# EAGLE board EagleIO (EAGLE 7.2.0)
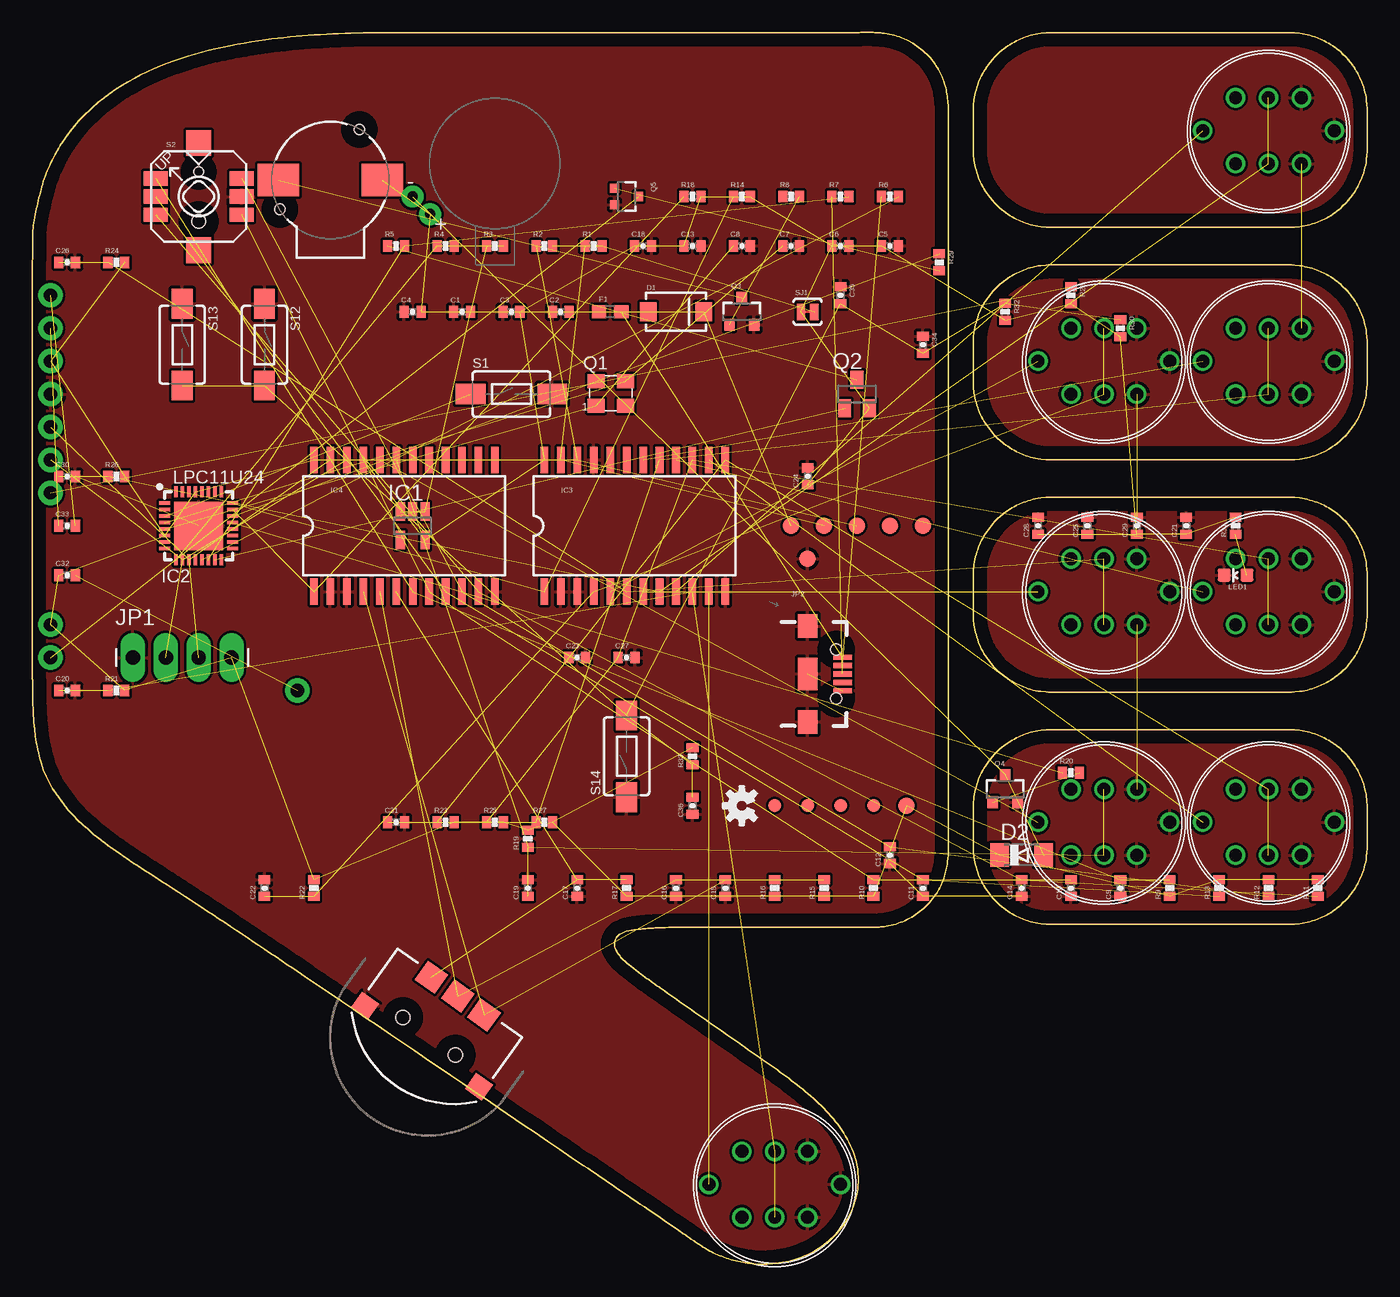
[diagram p0: board, top side]
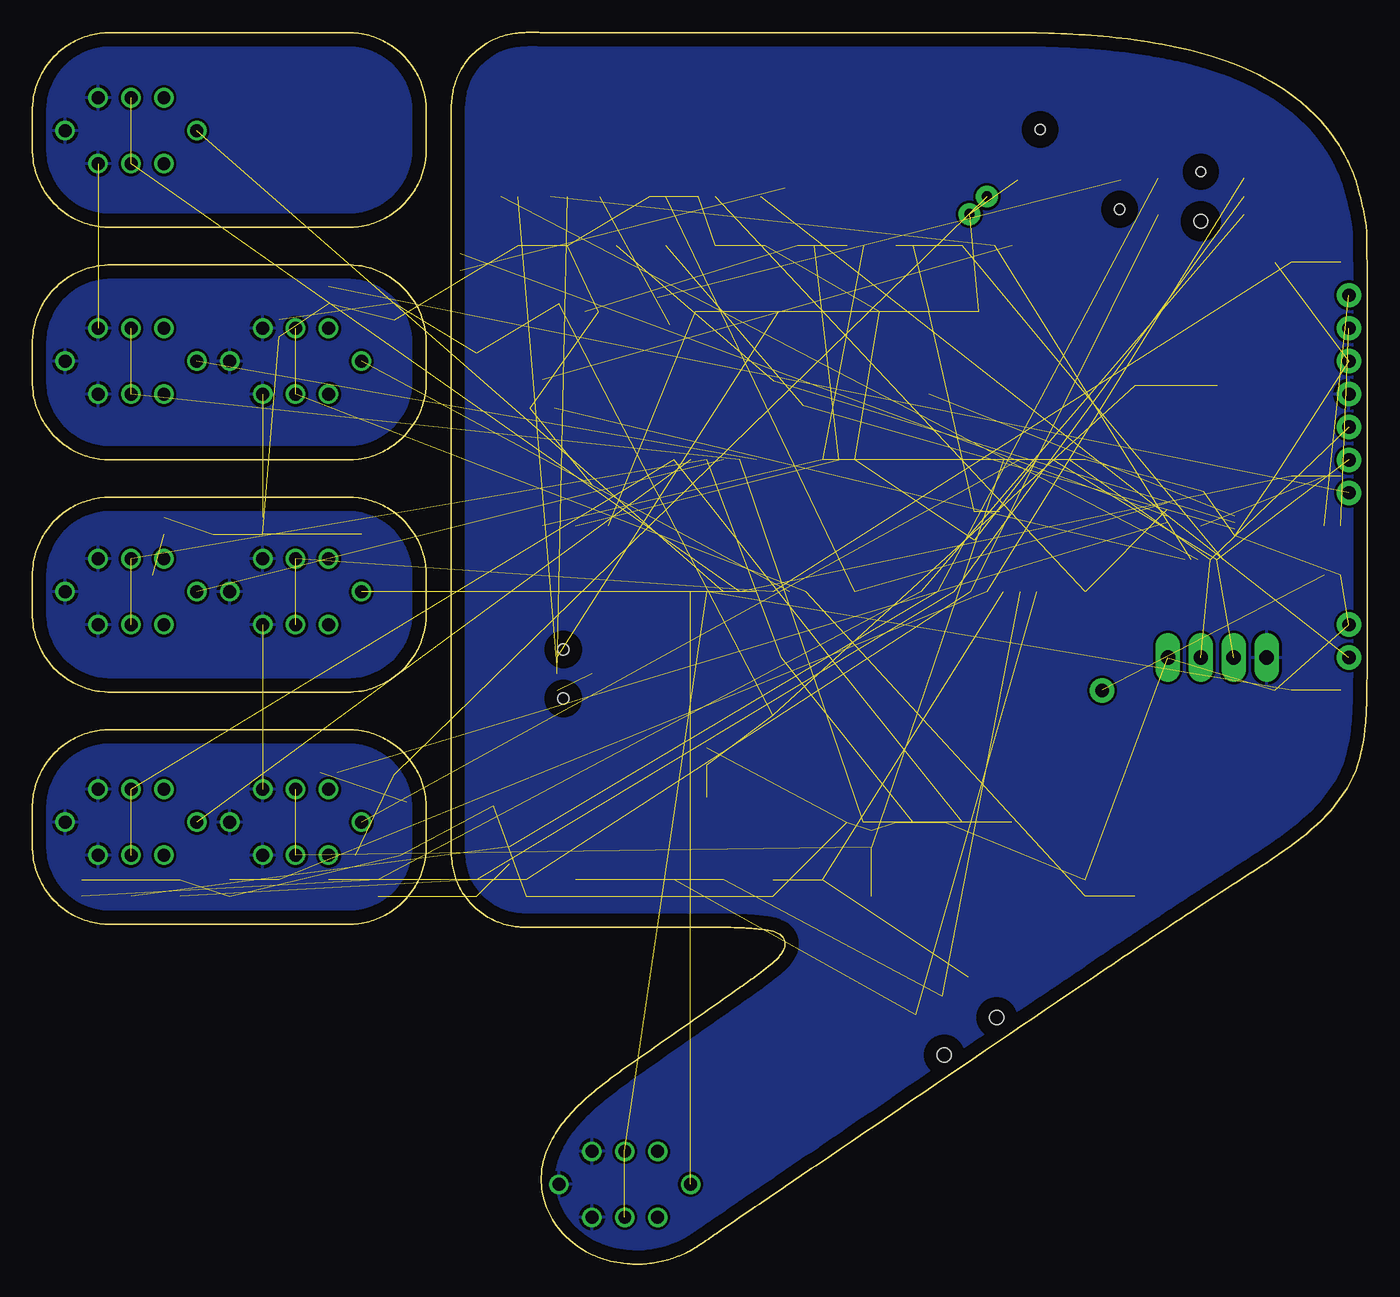
[diagram p1: board, bottom side, seen from below]

Size 102.99 x 95.01 mm. Coordinates in mm from the lower left corner, seen from the top.
Outline: 56.86,0.01 57.12,0.03 57.37,0.05 57.63,0.09 57.88,0.13 58.13,0.18 58.38,0.24 58.63,0.3 58.87,0.37 59.35,0.54 59.59,0.64 59.82,0.75 60.05,0.85 60.27,0.97 60.49,1.1 60.71,1.23 60.92,1.37 61.33,1.68 61.52,1.84 61.9,2.19 62.07,2.38 62.24,2.58 62.41,2.78 62.57,2.99 62.71,3.21 62.85,3.43 62.98,3.65 63.1,3.89 63.21,4.12 63.31,4.35 63.4,4.6 63.48,4.84 63.55,5.08 63.66,5.58 63.7,5.83 63.72,6.09 63.74,6.34 63.75,6.6 63.72,7.11 63.69,7.37 63.64,7.63 63.59,7.88 63.52,8.14 63.44,8.39 63.35,8.65 63.25,8.9 63.13,9.15 63.02,9.4 62.89,9.64 62.75,9.87 62.61,10.11 62.46,10.33 62.3,10.56 62.15,10.78 61.98,11 61.8,11.21 61.63,11.42 61.44,11.62 61.25,11.83 61.06,12.03 60.87,12.22 60.67,12.41 60.47,12.6 60.27,12.78 60.06,12.96 59.86,13.14 59.65,13.31 59.44,13.48 59.23,13.66 59.01,13.83 58.58,14.16 58.36,14.33 58.14,14.49 57.92,14.66 57.7,14.82 57.48,14.98 57.25,15.14 57.03,15.3 56.81,15.46 56.58,15.62 56.35,15.77 56.13,15.93 55.9,16.09 55.68,16.25 55.45,16.4 55.23,16.56 55,16.71 54.77,16.87 54.55,17.03 54.32,17.18 54.1,17.34 53.87,17.5 53.63,17.66 53.17,17.99 52.94,18.15 52.71,18.31 52.48,18.47 52.24,18.64 52.01,18.8 51.78,18.96 51.55,19.12 51.32,19.28 51.08,19.45 50.85,19.61 50.62,19.77 50.39,19.93 50.16,20.1 49.93,20.26 49.7,20.42 49.46,20.59 49.23,20.75 49,20.91 48.77,21.08 48.54,21.24 48.44,21.31 48.34,21.38 48.24,21.46 48.14,21.53 48.03,21.6 47.93,21.67 47.83,21.74 47.73,21.82 47.63,21.89 47.53,21.96 47.42,22.03 47.32,22.1 47.22,22.18 47.12,22.25 46.92,22.4 46.82,22.47 46.72,22.55 46.62,22.62 46.52,22.7 46.43,22.78 46.33,22.86 46.23,22.93 46.14,23.01 46.07,23.07 46,23.12 45.93,23.19 45.86,23.25 45.78,23.32 45.7,23.39 45.63,23.46 45.55,23.53 45.4,23.69 45.33,23.77 45.2,23.94 45.14,24.03 45.04,24.21 44.99,24.3 44.96,24.39 44.93,24.49 44.91,24.58 44.91,24.68 44.91,24.77 44.92,24.87 44.95,24.96 44.98,25.06 45.03,25.15 45.09,25.23 45.15,25.31 45.23,25.38 45.32,25.43 45.41,25.49 45.5,25.54 45.71,25.63 45.83,25.66 46.06,25.72 46.17,25.75 46.29,25.77 46.41,25.79 46.53,25.8 46.76,25.83 46.87,25.84 46.97,25.85 47.07,25.86 47.17,25.86 47.25,25.87 47.37,25.88 47.48,25.89 47.71,25.91 47.83,25.92 47.94,25.93 48.06,25.93 48.18,25.94 48.29,25.95 48.41,25.95 48.52,25.96 48.64,25.96 48.76,25.96 48.87,25.97 49.1,25.97 49.22,25.98 49.34,25.98 49.45,25.98 49.57,25.98 49.68,25.98 49.8,25.98 49.92,25.98 50.03,25.98 50.28,25.98 50.53,25.99 51.04,25.99 51.29,25.99 51.54,25.99 51.79,25.99 52.04,25.99 52.29,25.99 52.55,25.99 52.8,25.99 53.05,25.99 53.3,25.99 53.55,25.99 53.8,25.99 54.06,25.99 54.31,25.99 54.56,25.99 54.81,25.99 55.06,25.99 55.31,25.99 55.56,25.99 55.82,25.99 56.07,25.99 56.37,25.99 56.68,25.99 57.28,25.99 57.59,25.99 57.89,25.99 58.2,25.99 58.5,25.99 58.81,25.99 59.11,25.99 59.41,25.99 59.72,25.99 60.02,25.99 60.33,25.99 60.94,25.99 61.24,25.99 61.54,25.99 61.85,25.99 62.15,25.99 62.46,25.99 62.76,25.99 63.07,25.99 63.47,25.99 63.57,25.99 63.68,25.99 63.78,25.99 63.89,25.99 63.99,25.99 64.09,25.99 64.2,25.98 64.3,25.98 64.41,25.98 64.51,25.98 64.72,25.98 64.83,25.98 65.03,25.99 65.14,25.99 65.24,26 65.35,26 65.45,26.01 65.65,26.03 65.76,26.05 65.86,26.06 66.05,26.09 66.24,26.13 66.43,26.18 66.62,26.23 66.8,26.29 66.98,26.36 67.17,26.43 67.34,26.51 67.52,26.59 67.69,26.68 67.86,26.78 68.02,26.88 68.18,26.98 68.34,27.1 68.5,27.22 68.65,27.34 68.79,27.46 68.93,27.6 69.07,27.73 69.21,27.87 69.33,28.02 69.46,28.17 69.58,28.32 69.69,28.48 69.78,28.62 69.87,28.76 69.95,28.91 70.03,29.05 70.1,29.19 70.23,29.49 70.29,29.64 70.34,29.79 70.39,29.94 70.43,30.09 70.47,30.24 70.51,30.4 70.54,30.55 70.57,30.71 70.6,30.86 70.62,31.02 70.65,31.34 70.66,31.5 70.67,31.66 70.68,31.82 70.68,31.99 70.68,89.06 70.68,89.23 70.67,89.41 70.66,89.58 70.65,89.75 70.62,89.92 70.6,90.08 70.58,90.25 70.54,90.42 70.51,90.58 70.47,90.75 70.38,91.07 70.33,91.23 70.27,91.39 70.21,91.54 70.14,91.7 70.07,91.85 69.99,92.01 69.91,92.16 69.82,92.3 69.73,92.45 69.63,92.6 69.52,92.74 69.4,92.89 69.28,93.04 69.01,93.33 68.87,93.46 68.72,93.59 68.58,93.72 68.42,93.84 68.11,94.06 67.94,94.17 67.6,94.36 67.43,94.44 67.25,94.52 67.07,94.6 66.89,94.67 66.71,94.73 66.52,94.79 66.33,94.84 66.14,94.88 65.95,94.92 65.76,94.95 65.56,94.97 65.47,94.98 65.37,94.99 65.27,94.99 65.18,95 65.08,95 64.98,95.01 64.88,95.01 64.79,95.01 64.69,95.01 64.59,95.01 64.5,95.01 64.4,95.01 64.3,95.01 64.2,95.01 64.1,95.01 64.01,95.01 63.91,95.01 63.81,95.01 63.72,95.01 63.62,95 63.42,95 63.33,95 28.85,95 28.37,95 27.9,95 27.43,95 26.95,94.99 26.48,94.99 26.01,94.98 25.54,94.97 24.59,94.95 24.12,94.93 23.65,94.92 23.17,94.9 22.7,94.87 22.23,94.85 21.76,94.82 21.29,94.79 20.82,94.75 20.34,94.71 19.87,94.67 19.4,94.62 18.93,94.57 18.46,94.51 17.99,94.45 17.45,94.37 16.9,94.29 16.35,94.2 15.8,94.1 15.26,94 14.71,93.88 14.16,93.76 13.62,93.63 13.08,93.49 12.53,93.34 12,93.18 10.94,92.83 10.41,92.64 9.89,92.42 9.38,92.21 8.87,91.98 8.37,91.73 7.88,91.48 7.39,91.21 6.92,90.92 6.45,90.63 5.99,90.31 5.54,89.97 5.33,89.81 5.12,89.65 4.92,89.48 4.72,89.31 4.52,89.13 4.33,88.95 4.14,88.77 3.95,88.58 3.59,88.19 3.42,88 3.08,87.59 2.91,87.39 2.6,86.96 2.45,86.75 2.16,86.3 2.02,86.08 1.76,85.62 1.63,85.39 1.52,85.15 1.42,84.95 1.33,84.75 1.15,84.34 1.07,84.14 1,83.93 0.92,83.72 0.86,83.52 0.79,83.31 0.73,83.1 0.67,82.89 0.55,82.47 0.5,82.26 0.45,82.05 0.4,81.83 0.36,81.62 0.31,81.41 0.27,81.19 0.23,80.97 0.19,80.76 0.15,80.54 0.12,80.32 0.08,80.1 0.07,80.01 0.06,79.92 0.04,79.73 0.03,79.64 0.02,79.45 0.02,79.36 0.01,79.26 0.01,79.16 0.01,79.07 0.01,78.97 0.01,78.87 0.01,78.78 0.01,78.68 0.01,78.59 0.01,78.49 0.02,78.3 0.02,78.2 0.02,78.11 0.02,78.02 0.02,77.92 0.01,77.83 0.01,77.73 0.01,77.63 0.01,77.53 0.01,77.44 0.01,77.34 0,77.24 0,77.14 0,77.04 0,76.94 0,76.84 0,76.75 0,76.65 0,76.55 0,76.45 0,76.35 0,76.25 0,76.15 0,76.06 0,75.96 0,75.86 0,75.76 0,75.66 0,75.56 0,49.36 0,49.17 0,48.98 0,48.79 0,48.6 0,48.41 0,48.22 0,48.04 0,47.66 0,47.47 0,47.28 0,47.09 0,46.9 0,46.71 0,46.52 0,46.33 0,46.14 0,45.95 0,45.76 0,45.57 0,45.38 0.01,45.19 0.01,45 0.01,44.74 0.01,44.47 0.02,44.21 0.02,43.94 0.02,43.68 0.03,43.41 0.04,43.14 0.05,42.87 0.07,42.34 0.09,42.07 0.11,41.8 0.14,41.54 0.16,41.27 0.23,40.74 0.27,40.48 0.31,40.21 0.36,39.95 0.41,39.69 0.48,39.43 0.54,39.17 0.61,38.92 0.69,38.66 0.85,38.15 1.06,37.66 1.3,37.19 1.54,36.72 1.82,36.28 2.13,35.85 2.44,35.43 2.78,35.02 3.14,34.64 3.51,34.25 3.89,33.88 4.3,33.53 4.7,33.18 5.12,32.84 5.98,32.18 6.42,31.87 7.31,31.26 7.75,30.97 8.2,30.68 8.64,30.39 9.08,30.11 9.51,29.84 9.96,29.55 10.4,29.26 10.85,28.97 11.29,28.69 11.73,28.4 12.18,28.11 12.62,27.82 13.06,27.53 13.51,27.23 13.95,26.94 14.39,26.65 14.83,26.36 15.27,26.06 15.71,25.77 16.15,25.48 16.59,25.18 17.03,24.89 17.47,24.59 17.91,24.3 18.35,24 18.79,23.7 19.23,23.41 19.67,23.11 20.11,22.82 21.05,22.18 21.98,21.55 22.92,20.92 23.85,20.29 24.79,19.65 25.72,19.02 26.66,18.38 27.59,17.75 28.53,17.12 29.46,16.48 30.4,15.85 32.27,14.58 33.2,13.94 34.14,13.31 35.07,12.67 36.01,12.04 37.87,10.77 38.81,10.13 39.74,9.5 40.68,8.86 41.61,8.23 42.55,7.59 42.86,7.38 43.17,7.17 43.48,6.96 43.79,6.74 44.1,6.53 44.41,6.32 44.73,6.11 45.04,5.9 45.66,5.47 45.97,5.26 46.28,5.05 46.59,4.84 46.9,4.62 47.22,4.41 47.53,4.2 47.84,3.99 48.46,3.57 48.77,3.35 49.4,2.93 49.71,2.72 50.02,2.51 50.12,2.44 50.22,2.37 50.32,2.29 50.42,2.22 50.53,2.15 50.63,2.08 50.73,2.01 50.83,1.94 51.04,1.8 51.14,1.73 51.34,1.59 51.45,1.52 51.55,1.45 51.66,1.38 51.76,1.32 51.87,1.25 51.97,1.19 52.08,1.13 52.3,1.01 52.41,0.95 52.52,0.9 52.69,0.81 52.86,0.74 53.03,0.66 53.2,0.59 53.38,0.53 53.55,0.47 53.73,0.41 53.91,0.35 54.09,0.3 54.27,0.26 54.45,0.21 54.63,0.18 54.82,0.14 55,0.11 55.19,0.08 55.37,0.06 55.56,0.04 55.93,0.01 56.12,0 56.49,0 56.68,0 56.86,0.01
Outline: 78.41,44.13 78.2,44.14 77.8,44.18 77.6,44.21 77.41,44.25 77.21,44.29 77.02,44.34 76.84,44.4 76.65,44.46 76.46,44.52 76.11,44.68 75.93,44.76 75.76,44.85 75.59,44.95 75.43,45.05 75.27,45.15 75.11,45.26 74.95,45.38 74.8,45.5 74.66,45.62 74.51,45.75 74.24,46.02 74.11,46.17 73.87,46.46 73.75,46.62 73.64,46.78 73.53,46.94 73.43,47.1 73.34,47.27 73.25,47.44 73.16,47.62 73.01,47.98 72.94,48.16 72.89,48.35 72.83,48.53 72.78,48.73 72.74,48.92 72.7,49.12 72.67,49.31 72.62,49.72 72.61,49.92 72.61,53.36 72.62,53.57 72.67,53.97 72.7,54.17 72.74,54.36 72.78,54.56 72.83,54.75 72.89,54.94 72.94,55.12 73.01,55.31 73.16,55.67 73.25,55.84 73.34,56.01 73.43,56.18 73.53,56.35 73.75,56.67 73.87,56.82 74.11,57.12 74.24,57.26 74.51,57.53 74.66,57.66 74.95,57.91 75.11,58.02 75.43,58.24 75.59,58.34 75.76,58.43 75.93,58.52 76.11,58.61 76.46,58.76 76.65,58.83 76.84,58.89 77.02,58.95 77.21,59 77.6,59.08 77.8,59.11 78.2,59.15 78.41,59.16 97.2,59.16 97.4,59.15 97.8,59.11 98,59.08 98.2,59.04 98.39,59 98.58,58.95 98.77,58.89 98.96,58.83 99.14,58.76 99.5,58.61 99.68,58.52 99.85,58.43 100.02,58.34 100.18,58.24 100.5,58.02 100.65,57.91 100.95,57.66 101.09,57.53 101.37,57.26 101.49,57.12 101.74,56.82 101.86,56.67 102.07,56.35 102.17,56.18 102.27,56.01 102.36,55.84 102.44,55.67 102.59,55.31 102.66,55.12 102.72,54.94 102.78,54.75 102.83,54.56 102.91,54.17 102.94,53.97 102.98,53.57 102.99,53.36 102.99,49.92 102.98,49.72 102.94,49.31 102.91,49.12 102.87,48.92 102.83,48.73 102.78,48.53 102.72,48.35 102.66,48.16 102.59,47.98 102.44,47.62 102.36,47.44 102.27,47.27 102.17,47.1 102.07,46.94 101.96,46.78 101.86,46.62 101.74,46.46 101.49,46.17 101.37,46.02 101.09,45.75 100.95,45.62 100.8,45.5 100.65,45.38 100.5,45.26 100.34,45.15 100.18,45.05 100.02,44.95 99.85,44.85 99.68,44.76 99.5,44.68 99.14,44.52 98.96,44.46 98.77,44.4 98.58,44.34 98.39,44.29 98.2,44.25 98,44.21 97.8,44.18 97.4,44.14 97.2,44.13 78.41,44.13
Outline: 78.41,26.2 78.2,26.21 77.8,26.26 77.6,26.29 77.41,26.33 77.21,26.37 77.02,26.42 76.84,26.48 76.65,26.53 76.46,26.6 76.11,26.75 75.93,26.84 75.76,26.93 75.59,27.02 75.43,27.12 75.27,27.23 75.11,27.34 74.95,27.46 74.66,27.7 74.51,27.83 74.24,28.1 74.11,28.25 73.99,28.39 73.87,28.54 73.75,28.7 73.64,28.86 73.53,29.02 73.43,29.18 73.34,29.35 73.25,29.52 73.16,29.7 73.01,30.05 72.94,30.24 72.89,30.43 72.83,30.61 72.78,30.8 72.74,31 72.7,31.19 72.67,31.39 72.62,31.79 72.61,32 72.61,35.44 72.62,35.65 72.65,35.85 72.67,36.05 72.7,36.25 72.74,36.44 72.78,36.64 72.83,36.83 72.89,37.02 72.94,37.2 73.01,37.39 73.16,37.75 73.25,37.92 73.34,38.09 73.43,38.26 73.53,38.43 73.75,38.74 73.87,38.9 74.11,39.2 74.24,39.34 74.38,39.47 74.51,39.61 74.66,39.74 74.95,39.98 75.11,40.1 75.43,40.32 75.59,40.42 75.76,40.51 75.93,40.6 76.11,40.69 76.46,40.84 76.65,40.91 76.84,40.97 77.02,41.02 77.21,41.07 77.6,41.15 77.8,41.18 78.2,41.23 78.41,41.24 97.2,41.24 97.4,41.23 97.8,41.18 98,41.15 98.2,41.11 98.39,41.07 98.58,41.02 98.77,40.97 98.96,40.91 99.14,40.84 99.5,40.69 99.68,40.6 99.85,40.51 100.02,40.42 100.18,40.32 100.5,40.1 100.65,39.98 100.95,39.74 101.09,39.61 101.23,39.47 101.37,39.34 101.49,39.2 101.74,38.9 101.86,38.74 102.07,38.43 102.17,38.26 102.27,38.09 102.36,37.92 102.44,37.75 102.59,37.39 102.66,37.2 102.72,37.02 102.78,36.83 102.83,36.64 102.91,36.25 102.94,36.05 102.96,35.85 102.98,35.65 102.99,35.44 102.99,32 102.98,31.79 102.94,31.39 102.91,31.19 102.87,31 102.83,30.8 102.78,30.61 102.72,30.43 102.66,30.24 102.59,30.05 102.44,29.7 102.36,29.52 102.27,29.35 102.17,29.18 102.07,29.02 101.96,28.86 101.86,28.7 101.74,28.54 101.62,28.39 101.49,28.25 101.37,28.1 101.09,27.83 100.95,27.7 100.65,27.46 100.5,27.34 100.34,27.23 100.18,27.12 100.02,27.02 99.85,26.93 99.68,26.84 99.5,26.75 99.14,26.6 98.96,26.53 98.77,26.48 98.58,26.42 98.39,26.37 98.2,26.33 98,26.29 97.8,26.26 97.4,26.21 97.2,26.2 78.41,26.2
Outline: 78.41,62.05 78.2,62.06 77.8,62.1 77.6,62.13 77.21,62.21 77.02,62.26 76.84,62.32 76.65,62.38 76.46,62.44 76.11,62.6 75.93,62.68 75.76,62.77 75.59,62.87 75.43,62.97 75.27,63.08 75.11,63.18 74.95,63.3 74.66,63.54 74.51,63.67 74.24,63.95 74.11,64.09 73.87,64.38 73.75,64.54 73.64,64.7 73.53,64.86 73.43,65.02 73.34,65.19 73.25,65.36 73.16,65.54 73.01,65.9 72.94,66.08 72.89,66.27 72.83,66.46 72.78,66.65 72.74,66.84 72.7,67.04 72.67,67.24 72.62,67.64 72.61,67.84 72.61,71.29 72.62,71.49 72.67,71.89 72.7,72.09 72.74,72.28 72.78,72.48 72.83,72.67 72.89,72.86 72.94,73.05 73.01,73.23 73.16,73.59 73.25,73.76 73.34,73.93 73.43,74.1 73.53,74.27 73.75,74.59 73.87,74.74 74.11,75.04 74.24,75.18 74.51,75.45 74.66,75.58 74.95,75.83 75.11,75.94 75.27,76.05 75.43,76.16 75.59,76.26 75.76,76.35 75.93,76.45 76.11,76.53 76.46,76.68 76.65,76.75 76.84,76.81 77.02,76.87 77.21,76.92 77.6,77 77.8,77.03 78.2,77.07 78.41,77.08 97.2,77.08 97.4,77.07 97.8,77.03 98,77 98.2,76.96 98.39,76.92 98.58,76.87 98.77,76.81 98.96,76.75 99.14,76.68 99.5,76.53 99.68,76.45 99.85,76.35 100.02,76.26 100.18,76.16 100.34,76.05 100.5,75.94 100.65,75.83 100.95,75.58 101.09,75.45 101.37,75.18 101.49,75.04 101.74,74.74 101.86,74.59 102.07,74.27 102.17,74.1 102.27,73.93 102.36,73.76 102.44,73.59 102.59,73.23 102.66,73.05 102.72,72.86 102.78,72.67 102.83,72.48 102.91,72.09 102.94,71.89 102.98,71.49 102.99,71.29 102.99,67.84 102.98,67.64 102.94,67.24 102.91,67.04 102.87,66.84 102.83,66.65 102.78,66.46 102.72,66.27 102.66,66.08 102.59,65.9 102.44,65.54 102.36,65.36 102.27,65.19 102.17,65.02 102.07,64.86 101.96,64.7 101.86,64.54 101.74,64.38 101.49,64.09 101.37,63.95 101.09,63.67 100.95,63.54 100.65,63.3 100.5,63.18 100.34,63.08 100.18,62.97 100.02,62.87 99.68,62.68 99.5,62.6 99.14,62.44 98.96,62.38 98.77,62.32 98.58,62.26 98.39,62.21 98.2,62.17 98,62.13 97.8,62.1 97.4,62.06 97.2,62.05 78.41,62.05
Outline: 78.41,79.97 78.2,79.98 77.8,80.02 77.6,80.05 77.21,80.13 77.02,80.18 76.84,80.24 76.65,80.3 76.46,80.37 76.11,80.52 75.93,80.6 75.76,80.7 75.59,80.79 75.43,80.89 75.11,81.11 74.95,81.22 74.66,81.47 74.51,81.6 74.24,81.87 74.11,82.01 73.87,82.31 73.75,82.46 73.53,82.78 73.43,82.95 73.34,83.12 73.25,83.29 73.16,83.46 73.01,83.82 72.94,84 72.89,84.19 72.83,84.38 72.78,84.57 72.74,84.76 72.7,84.96 72.67,85.16 72.62,85.56 72.61,85.76 72.61,89.21 72.62,89.41 72.67,89.81 72.7,90.01 72.74,90.21 72.78,90.4 72.83,90.59 72.89,90.78 72.94,90.97 73.01,91.15 73.16,91.51 73.25,91.68 73.34,91.85 73.43,92.02 73.53,92.19 73.64,92.35 73.75,92.51 73.87,92.66 74.11,92.96 74.24,93.1 74.51,93.37 74.66,93.5 74.95,93.75 75.11,93.86 75.27,93.97 75.43,94.08 75.59,94.18 75.76,94.27 75.93,94.37 76.11,94.45 76.46,94.6 76.65,94.67 76.84,94.73 77.02,94.79 77.21,94.84 77.41,94.88 77.6,94.92 77.8,94.95 78.2,94.99 78.41,95 97.2,95 97.4,94.99 97.8,94.95 98,94.92 98.2,94.88 98.39,94.84 98.58,94.79 98.77,94.73 98.96,94.67 99.14,94.6 99.5,94.45 99.68,94.37 99.85,94.27 100.02,94.18 100.18,94.08 100.34,93.97 100.5,93.86 100.65,93.75 100.95,93.5 101.09,93.37 101.37,93.1 101.49,92.96 101.74,92.66 101.86,92.51 101.96,92.35 102.07,92.19 102.17,92.02 102.27,91.85 102.36,91.68 102.44,91.51 102.59,91.15 102.66,90.97 102.72,90.78 102.78,90.59 102.83,90.4 102.87,90.21 102.91,90.01 102.94,89.81 102.98,89.41 102.99,89.21 102.99,85.76 102.98,85.56 102.94,85.16 102.91,84.96 102.87,84.76 102.83,84.57 102.78,84.38 102.72,84.19 102.66,84 102.59,83.82 102.44,83.46 102.36,83.29 102.27,83.12 102.17,82.95 102.07,82.78 101.86,82.46 101.74,82.31 101.49,82.01 101.37,81.87 101.09,81.6 100.95,81.47 100.65,81.22 100.5,81.11 100.18,80.89 100.02,80.79 99.85,80.7 99.68,80.6 99.5,80.52 99.14,80.37 98.96,80.3 98.77,80.24 98.58,80.18 98.39,80.13 98.2,80.09 98,80.05 97.8,80.02 97.4,79.98 97.2,79.97 78.41,79.97
Copper layers (1*16): Top 0.035mm / dielectric 1.5mm / Bottom 0.035mm
Design rules "default": minimum track width 10mil, minimum drill 24mil, track to track 8mil, track to pad 8mil, pad to pad 8mil, via to via 8mil, smd to smd 8mil, copper to edge 40mil, drill to drill 8mil, minimum pad ring 10mil, minimum via ring 8mil, stop-mask expansion 4mil, vias tented up to drill 0mil, thermal gap 10mil
Net classes: 0 default: width 0.254 mm, drill 0.254 mm, clearance 0.203 mm; 1 power: width 0.61 mm, drill 0.61 mm, clearance 0.254 mm

## Footprints (pad centres in the part's own frame; a part is rotated, then mirrored left to right if it is on the bottom)
0402-CAP = smd 0.7 x 0.9: 1 -0.65,0; 2 0.65,0
SMA-DIODE = smd 1.27 x 1.47: A -2.15,0; C 2.15,0
MINIMELF = smd 1.4 x 1.8: A 1.7,0; C -1.7,0
0603 = smd 1.1 x 1: 1 -0.85,0; 2 0.85,0
FIDUCIAL-1X2 = smd 1 x 1: 1 0,0
SOT23-5 = smd 0.7 x 1.4: 1 0.95,1.1; 2 0,1.1; 3 -0.95,1.1; 4 -0.95,-1.1; 5 0.95,-1.1
HVQFN33_5X5MM = smd 0.85 x 0.27: 1 -2.625,1.75; 2 -2.625,1.25; 3 -2.625,0.75; 4 -2.625,0.25; 5 -2.625,-0.25; 6 -2.625,-0.75; 7 -2.625,-1.25; 8 -2.625,-1.75; 17 2.625,-1.75; 18 2.625,-1.25; 19 2.625,-0.75; 20 2.625,-0.25; 21 2.625,0.25; 22 2.625,0.75; 23 2.625,1.25; 24 2.625,1.75 | smd 0.27 x 0.85: 9 -1.75,-2.625; 10 -1.25,-2.625; 11 -0.75,-2.625; 12 -0.25,-2.625; 13 0.25,-2.625; 14 0.75,-2.625; 15 1.25,-2.625; 16 1.75,-2.625; 25 1.75,2.625; 26 1.25,2.625; 27 0.75,2.625; 28 0.25,2.625; 29 -0.25,2.625; 30 -0.75,2.625; 31 -1.25,2.625; 32 -1.75,2.625 | smd 3.75 x 3.75: 33 0,0
SO-24DW = smd 0.584 x 2.032: 1 -6.35,-5.08; 2 -5.08,-5.08; 3 -3.81,-5.08; 4 -2.54,-5.08; 5 -1.27,-5.08; 6 0,-5.08; 7 1.27,-5.08; 8 2.54,-5.08; 9 3.81,-5.08; 10 5.08,-5.08; 11 6.35,-5.08; 12 7.62,-5.08; 13 7.62,5.08; 14 6.35,5.08; 15 5.08,5.08; 16 3.81,5.08; 17 2.54,5.08; 18 1.27,5.08; 19 0,5.08; 20 -1.27,5.08; 21 -2.54,5.08; 22 -3.81,5.08; 23 -5.08,5.08; 24 -6.35,5.08
1X04_LONGPADS = drill 1.118 pad 1.88 long: 1 0,0; 2 2.54,0; 3 5.08,0; 4 7.62,0
USB-B-MICRO-SMD_V03 = smd 1.4 x 0.4: D+1 2.7,0; D-1 2.7,0.65; GND1 2.7,-1.3; ID1 2.7,-0.65; VBUS1 2.7,1.3 | smd 1.5 x 1.8: SHIELD1 0,3.7; SHIELD2 0,-3.7 | smd 1.5 x 2.5: SHIELD3 0,0 | hole 0.85: 2.2,1.9; 2.2,-1.9
1X01NS-KIT = drill 1.016 pad 1.88: 1 0,0
LED-0603 = smd 1 x 1: A 0,-0.877; C 0,0.877
VIBE-MOTOR-10MM = drill 0.8 pad 1.676: + -5,-3.9; - -6.35,-2.54
CRYSTAL_3.2X2.5 = smd 1.3 x 1.1: 1 -1.1,-0.9; 2 1.2,-0.9; 3 1.2,1; 4 -1.1,1
SOT23 = smd 1 x 1.4: 1 -0.95,-1.1; 2 0.95,-1.1; 3 0,1.1
SOT23-3 = smd 0.8 x 0.9: 1 -0.95,-1; 2 0.95,-1; 3 0,1.1
SOT323 = smd 0.7 x 0.7: 1 -0.65,-0.925; 2 0.65,-0.925; 3 0,0.925
0402-RES = smd 0.7 x 0.9: 1 -0.65,0; 2 0.65,0
TACTILE-SWITCH-1101NE = smd 2.3 x 1.6: 1 -3.15,0; 2 3.15,0
JOYSTICK_MINI = smd 1.85 x 1.1: A -3.325,1.4; B 3.325,1.4; C -3.325,-1.4; CTR -3.325,0; D 3.325,-1.4; GND 3.325,0 | smd 1.9 x 2: NC 0,4.13; NC@0 0,-4.13 | hole 0.75: 0,1.9 | hole 1.05: 0,-1.9
NAV_SWITCH = smd 1.9 x 1.8: 1 -2.5,-3.8; 2 2.5,-3.8; T 0,-3.8 | smd 1.6 x 1.5: C 5.4,0.95; NC -5.4,0.95 | hole 1.1: -2.5,0; 2.5,0
PB6136 = drill 1: C1 5.08,3.81; C2 5.08,-1.27; LED+ 0,1.27; LED- 10.16,1.27; NC1 2.54,3.81; NC2 2.54,-1.27; NO1 7.62,3.81; NO2 7.62,-1.27
BUZZER-CCV = smd 3.2 x 2.5: + 4,0; - -4,0 | hole 0.8: -3.9,-2.25; 2.25,3.9
PAD-JUMPER-2-NC_BY_TRACE_YES_SILK = smd 0.635 x 1.27: 1 -0.508,0; 2 0.508,0
PAD.03X.05 = smd 1.27 x 1.27: P$1 0,0

## Placement (x,y rotation side)
C1  1uF  [0402-CAP]  33.15,73.46 0 top
C2  10uF 10V  [0402-CAP]  40.77,73.46 0 top
C3  10uF 10V  [0402-CAP]  36.96,73.46 0 top
C4  1uF  [0402-CAP]  29.34,73.46 0 top
C5  0.1uF  [0402-CAP]  66.17,78.54 0 top
C6  0.1uF  [0402-CAP]  62.36,78.54 0 top
C7  27pF  [0402-CAP]  58.55,78.54 0 top
C8  27pF  [0402-CAP]  54.74,78.54 0 top
C9  0.1uF  [0402-CAP]  83.95,29.01 90 top
C10  0.1uF  [0402-CAP]  80.14,29.01 90 top
C11  0.1uF  [0402-CAP]  68.71,29.01 90 top
C12  0.1uF  [0402-CAP]  66.17,31.55 90 top
C13  0.1uF  [0402-CAP]  50.93,78.54 0 top
C14  0.1uF  [0402-CAP]  76.33,29.01 90 top
C15  0.1uF  [0402-CAP]  53.47,29.01 90 top
C16  0.1uF  [0402-CAP]  49.66,29.01 90 top
C17  0.1uF  [0402-CAP]  42.04,29.01 90 top
C18  0.1uF  [0402-CAP]  47.12,78.54 0 top
C19  0.1uF  [0402-CAP]  38.23,29.01 90 top
C20  0.1uF  [0402-CAP]  2.67,44.25 0 top
C21  0.1uF  [0402-CAP]  89.03,56.95 90 top
C22  0.1uF  [0402-CAP]  17.91,29.01 90 top
C23  0.1uF  [0402-CAP]  42.04,46.79 0 top
C24  0.1uF  [0402-CAP]  59.82,60.76 90 top
C25  0.1uF  [0402-CAP]  81.41,56.95 90 top
C26  0.1uF  [0402-CAP]  2.67,77.27 0 top
C27  0.1uF  [0402-CAP]  45.85,46.79 0 top
C28  0.1uF  [0402-CAP]  77.6,56.95 90 top
C29  0.1uF  [0402-CAP]  85.22,56.95 90 top
C30  0.1uF  [0402-CAP]  2.67,60.76 0 top
C31  0.1uF  [0402-CAP]  28.07,34.09 0 top
C32  1uF  [0402-CAP]  2.67,53.14 0 top
C33  1uF  [0402-CAP]  2.67,56.95 0 top
C34  0.1uF  [0402-CAP]  68.71,70.92 270 top
C35  0.1uF  [0402-CAP]  62.36,74.73 270 top
C36  0.1uF  [0402-CAP]  50.93,35.36 90 top
D1  MBRA140  [SMA-DIODE]  49.66,73.46 0 top
D2  4148  [MINIMELF]  76.33,31.55 0 top
F1  PTC0603  [0603]  44.58,73.46 0 top
FID1  FIDUCIAL1X2  [FIDUCIAL-1X2]  57.28,35.36 90 top
FID2  FIDUCIAL1X2  [FIDUCIAL-1X2]  59.82,35.36 90 top
FID3  FIDUCIAL1X2  [FIDUCIAL-1X2]  62.36,35.36 90 top
FID4  FIDUCIAL1X2  [FIDUCIAL-1X2]  64.9,35.36 90 top
IC1  AP2112K-3.3TRG1 3.3V  [SOT23-5]  29.34,56.95 0 top
IC2  LPC11U24  [HVQFN33_5X5MM]  12.83,56.95 0 top
IC3  PCF8575C  [SO-24DW]  45.85,56.95 0 top
IC4  PCF8575C  [SO-24DW]  28.07,56.95 0 top
JP1  [1X04_LONGPADS]  7.75,46.79 0 top
JP2  USB_MICROB_PLUGCONN-11752  [USB-B-MICRO-SMD_V03]  59.82,45.52 0 top
JP3  VOUT  [1X01NS-KIT]  20.45,44.25 0 top
JP4  CAP1N  [1X01NS-KIT]  1.4,74.73 0 top
JP5  CAP1P  [1X01NS-KIT]  1.4,72.19 0 top
JP6  VDD  [1X01NS-KIT]  1.4,69.65 0 top
JP7  VSS  [1X01NS-KIT]  1.4,67.11 0 top
JP8  SDA  [1X01NS-KIT]  1.4,64.57 0 top
JP9  SCL  [1X01NS-KIT]  1.4,62.03 0 top
JP10  RESET  [1X01NS-KIT]  1.4,59.49 0 top
JP11  A  [1X01NS-KIT]  1.4,49.33 0 top
JP12  K  [1X01NS-KIT]  1.4,46.79 0 top
LED1  [LED-0603]  92.84,53.14 90 top
LOGO1  OSHW-LOGOS  [OSHW-LOGO-S]  54.74,35.36 90 top
MOT1  MOTOR10MM  [VIBE-MOTOR-10MM]  35.69,84.89 0 top
Q1  12MHz 4 pad crystal 3.2x2.5  [CRYSTAL_3.2X2.5]  44.58,67.11 0 top
Q2  BSS84  [SOT23]  63.63,67.11 0 top
Q3  MMBT2222A  [SOT23-3]  54.74,73.46 0 top
Q4  MMBT2222A  [SOT23-3]  75.06,36.63 0 top
Q5  BSS138  [SOT323]  45.85,82.35 270 top
R1  4.7k  [0402-RES]  43.31,78.54 0 top
R2  4.7k  [0402-RES]  39.5,78.54 0 top
R3  1k  [0402-RES]  35.69,78.54 0 top
R4  100k  [0402-RES]  31.88,78.54 0 top
R5  1.5K  [0402-RES]  28.07,78.54 0 top
R6  33  [0402-RES]  66.17,82.35 0 top
R7  33  [0402-RES]  62.36,82.35 0 top
R8  10K  [0402-RES]  58.55,82.35 0 top
R9  10k  [0402-RES]  87.76,29.01 90 top
R10  10k  [0402-RES]  64.9,29.01 90 top
R11  10k  [0402-RES]  99.19,29.01 90 top
R12  10k  [0402-RES]  95.38,29.01 90 top
R13  10k  [0402-RES]  91.57,29.01 90 top
R14  10k  [0402-RES]  54.74,82.35 0 top
R15  10k  [0402-RES]  61.09,29.01 90 top
R16  10k  [0402-RES]  57.28,29.01 90 top
R17  10k  [0402-RES]  45.85,29.01 90 top
R18  10k  [0402-RES]  50.93,82.35 0 top
R19  10k  [0402-RES]  38.23,32.82 90 top
R20  10K  [0402-RES]  80.14,37.9 0 top
R21  10k  [0402-RES]  6.48,44.25 0 top
R22  10k  [0402-RES]  21.72,29.01 90 top
R23  10k  [0402-RES]  31.88,34.09 0 top
R24  10k  [0402-RES]  6.48,77.27 0 top
R25  10k  [0402-RES]  35.69,34.09 0 top
R26  10k  [0402-RES]  6.48,60.76 0 top
R27  10k  [0402-RES]  39.5,34.09 0 top
R28  1K  [0402-RES]  80.14,74.73 270 top
R29  1K  [0402-RES]  69.98,77.27 270 top
R30  10k  [0402-RES]  83.95,72.19 270 top
R31  1K  [0402-RES]  92.84,56.95 90 top
R32  10k  [0402-RES]  75.06,73.46 270 top
R33  10k  [0402-RES]  50.93,39.17 90 top
S1  PROGR  [TACTILE-SWITCH-1101NE]  36.96,67.11 0 top
S2  [JOYSTICK_MINI]  12.83,82.35 0 top
S3  NAV_SWITCHSMD  [NAV_SWITCH]  30.61,17.58 144.5 top
S4  PB6136  [PB6136]  77.6,32.82 0 top
S5  PB6136  [PB6136]  52.2,4.88 0 top
S6  PB6136  [PB6136]  77.6,68.38 0 top
S7  PB6136  [PB6136]  90.3,32.82 0 top
S8  PB6136  [PB6136]  77.6,50.6 0 top
S9  PB6136  [PB6136]  90.3,50.6 0 top
S10  PB6136  [PB6136]  90.3,86.16 0 top
S11  PB6136  [PB6136]  90.3,68.38 0 top
S12  PROGR  [TACTILE-SWITCH-1101NE]  17.91,70.92 270 top
S13  PROGR  [TACTILE-SWITCH-1101NE]  11.56,70.92 270 top
S14  PROGR  [TACTILE-SWITCH-1101NE]  45.85,39.17 90 top
SG1  BUZZERSMD2  [BUZZER-CCV]  22.99,83.62 0 top
SJ1  JUMPER-PAD-2-NC_BY_TRACE  [PAD-JUMPER-2-NC_BY_TRACE_YES_SILK]  59.82,73.46 0 top
TP1  [PAD.03X.05]  67.44,35.36 90 top
TP2  [PAD.03X.05]  58.55,56.95 90 top
TP3  [PAD.03X.05]  61.09,56.95 90 top
TP4  [PAD.03X.05]  63.63,56.95 90 top
TP5  [PAD.03X.05]  66.17,56.95 90 top
TP6  [PAD.03X.05]  68.71,56.95 90 top
TP7  [PAD.03X.05]  59.82,54.41 90 top

## Library data of the parts
C1-C36 R1-R7 R9-R19 R21-R27 R30 R32 R33 SJ1 TP1-TP7 = SparkFun-Passives
D1 = SparkFun-DiscreteSemi; PROD_ID: DIO-08053
D2 = diode
F1 = SparkFun-PowerIC
FID1-FID4 LOGO1 = SparkFun-Aesthetics
IC1 Q1 = GHI
IC2 = GHI-SoMs-Processors
IC3 IC4 = SparkFun-DigitalIC
JP1 JP3-JP12 = SparkFun-Connectors
JP2 = SparkFun-Connectors; PROD_ID: CONN-11752
LED1 = SparkFun-LED
MOT1 S3-S11 SG1 = SparkFun-Electromechanical
Q2 = transistor-small-signal
Q3 Q4 = SparkFun-DiscreteSemi; PROD_ID: TRANS-08049
Q5 = SparkFun-DiscreteSemi; PROD_ID: TRANS-11151
R8 R20 R28 R29 R31 = SparkFun
S1 S12-S14 = SparkFun-Electromechanical; PROD_ID: SWCH-00815
S2 = SparkFun-Electromechanical; PROD_ID: SWCH-09905

## Nets
3.3V: C3.2 C4.2 C5.1 C6.1 C13.1 C18.1 C21.1 C24.1 C25.1 C28.1 C29.1 C32.1 D2.C IC1.5 IC2.6 IC2.29 IC3.24 IC4.21 IC4.24 JP1.4 JP6.1 JP11.1 MOT1.+ Q2.2 R9.1 R10.1 R11.2 R12.2 R13.2 R14.2 R15.1 R16.1 R17.1 R18.2 R19.2 R21.2 R22.2 R23.2 R24.2 R25.2 R26.2 R27.2 R28.2 R30.2 R31.2 R32.2 R33.2 SG1.+ SJ1.1 TP1.P$1
BACK: JP12.1 Q5.3
BUZ: R8.1
BUZZ: IC2.20
CTBL: IC2.22 R29.1
D+: JP2.D+1 R7.1
D-: JP2.D-1 R6.1
GND: C1.1 C2.1 C3.1 C4.1 C5.2 C6.2 C7.2 C8.2 C9.1 C10.1 C11.1 C12.1 C13.2 C14.1 C15.1 C16.1 C17.1 C18.2 C19.2 C20.2 C21.2 C22.2 C23.2 C24.2 C25.2 C26.2 C27.2 C28.2 C29.2 C30.2 C31.2 C34.1 C35.1 C36.1 IC1.2 IC2.33 IC3.2 IC3.3 IC3.12 IC3.21 IC4.2 IC4.3 IC4.12 JP1.1 JP2.GND1 JP2.SHIELD1 JP2.SHIELD2 JP2.SHIELD3 JP7.1 LED1.C Q3.2 Q4.2 Q5.2 R4.2 S1.2 S2.GND S3.C S4.LED- S4.NO1 S4.NO2 S5.LED- S5.NO1 S5.NO2 S6.LED- S6.NO1 S6.NO2 S7.LED- S7.NO1 S7.NO2 S8.LED- S8.NO1 S8.NO2 S9.LED- S9.NO1 S9.NO2 S10.LED- S10.NO1 S10.NO2 S11.LED- S11.NO1 S11.NO2 S12.1 S13.1 S14.1 TP7.P$1
INTA: IC2.24 IC3.1 R14.1
INTB: IC2.23 IC4.1 R18.1
MEN1: C34.2 C35.2 C36.2 R30.1 R32.1 R33.1 S12.2 S13.2 S14.2
MI01: C22.1 IC3.4 R22.1 S6.C1 S6.C2
MI02: IC3.5 S6.LED+
MI03: C26.1 IC3.6 R24.1 S8.C1 S8.C2
MI04: IC3.7 S8.LED+
MI05: C30.1 IC3.8 R26.1 S10.C1 S10.C2
MI06: IC3.9 S10.LED+
MI07: C20.1 IC3.10 R21.1 S5.C1 S5.C2
MI08: IC3.11 S5.LED+
MI09: C23.1 IC3.13 R23.1 S7.C1 S7.C2
MI10: IC3.14 S7.LED+
MI11: C27.1 IC3.15 R25.1 S9.C1 S9.C2
MI12: IC3.16 S9.LED+
MI13: C31.1 IC3.17 R27.1 S11.C1 S11.C2
MI14: IC3.18 S11.LED+
MI15: IC3.19
MI16: IC3.20
MI18: C15.2 IC4.4 R15.2 S3.1
MI19: C16.2 IC4.5 R16.2 S3.T
MI20: C17.2 IC4.6 R17.2 S3.2
MI21: C9.2 IC4.7 R9.2 S2.A
MI22: C10.2 IC4.8 R10.2 S2.D
MI23: C11.2 IC4.9 R13.1 S2.CTR
MI24: C12.2 IC4.10 R12.1 S2.B
MI25: C14.2 IC4.11 R11.1 S2.C
MI26: IC4.13
MI27: IC4.14
MI28: IC4.15
MI29: IC4.16
MI30: IC4.17
MI31: IC4.18
MI32: C19.1 IC4.19 R19.1 S4.C1 S4.C2
MI33: IC4.20 S4.LED+
N$1: D2.A MOT1.- Q4.3
N$2: Q4.1 R20.2
N$3: C33.2 JP4.1
N$4: C33.1 JP5.1
N$5: C32.2 JP3.1
N$6: Q5.1 R29.2
N$7: JP10.1 R28.1
N$8: LED1.A R31.1
N$20: D1.A F1.1
N$21: F1.2 JP2.VBUS1
N$28: Q3.3 SG1.-
N$30: Q3.1 R8.2
N$33: IC2.14 R5.2 R7.2
N$34: IC2.13 R6.2
N$35: Q2.3 R5.1
N$36: IC2.15 Q2.1
N$37 [power]: R1.2 R2.2 SJ1.2
P0.3/ISP_COMMAND_USB_HIGH: IC2.9 R3.2 R4.1
PROGR: IC2.3 S1.1
RX: TP6.P$1
SCL: IC2.10 IC3.22 IC4.22 JP1.2 JP9.1 R2.1 TP4.P$1
SDA: IC2.11 IC3.23 IC4.23 JP1.3 JP8.1 R1.1 TP3.P$1
TX: TP5.P$1
VCC: C1.2 C2.2 D1.C IC1.1 IC1.3 R3.1 TP2.P$1
VIB: IC2.21 R20.1
XTALIN: C7.1 IC2.4 Q1.3
XTALOUT: C8.1 IC2.5 Q1.1

## Tracks (layer width: path | path; a pad name or v marks a point on that pad's centre or on a via)
3.3V  (49 unrouted)
BACK  (1 unrouted)
CTBL  (1 unrouted)
D+  (1 unrouted)
D-  (1 unrouted)
GND  (7 unrouted)
  pour Bottom: 71.89,25.2 104.27,25.2 104.27,41.71 71.89,41.71
  pour Top: 71.89,41.71 71.89,25.2 104.27,25.2 104.27,41.71
  pour Top: 71.89,59.49 71.89,42.98 104.27,42.98 104.27,59.49
  pour Bottom: 73.79,42.98 104.27,42.98 104.27,59.49 71.89,59.49 71.89,42.98
  pour Top: 71.89,77.91 71.89,62.03 103.64,62.03 103.64,77.91
  pour Bottom: 73.79,62.03 103.64,62.03 103.64,77.27 103.64,77.91 71.89,77.91 71.89,62.03
  pour Top: 71.89,95.69 103.64,95.69 103.64,79.81 71.89,79.81
  pour Bottom: 73.79,79.81 103.64,79.81 103.64,95.69 71.89,95.69 71.89,79.81
  pour Top: -2.41,96.32 -2.41,34.09 34.42,-2.74 71.25,-2.74 71.25,96.32
  pour Bottom: 56.01,96.32 -2.41,96.32 -2.41,34.09 35.06,-3.37 71.25,-3.37 71.25,96.32
INTA  (2 unrouted)
INTB  (2 unrouted)
MEN1  (8 unrouted)
MI01  (4 unrouted)
MI02  (1 unrouted)
MI03  (4 unrouted)
MI04  (1 unrouted)
MI05  (4 unrouted)
MI06  (1 unrouted)
MI07  (4 unrouted)
MI08  (1 unrouted)
MI09  (4 unrouted)
MI10  (1 unrouted)
MI11  (4 unrouted)
MI12  (1 unrouted)
MI13  (4 unrouted)
MI14  (1 unrouted)
MI18  (3 unrouted)
MI19  (3 unrouted)
MI20  (3 unrouted)
MI21  (3 unrouted)
MI22  (3 unrouted)
MI23  (3 unrouted)
MI24  (3 unrouted)
MI25  (3 unrouted)
MI32  (4 unrouted)
MI33  (1 unrouted)
N$1  (2 unrouted)
N$2  (1 unrouted)
N$3  (1 unrouted)
N$4  (1 unrouted)
N$5  (1 unrouted)
N$6  (1 unrouted)
N$7  (1 unrouted)
N$8  (1 unrouted)
N$20  (1 unrouted)
N$21  (1 unrouted)
N$28  (1 unrouted)
N$30  (1 unrouted)
N$33  (2 unrouted)
N$34  (1 unrouted)
N$35  (1 unrouted)
N$36  (1 unrouted)
N$37  (2 unrouted)
P0.3/ISP_COMMAND_USB_HIGH  (2 unrouted)
PROGR  (1 unrouted)
SCL  (6 unrouted)
SDA  (6 unrouted)
VCC  (6 unrouted)
VIB  (1 unrouted)
XTALIN  (2 unrouted)
XTALOUT  (2 unrouted)